# EAGLE board DroidOS (EAGLE 8.4.0)
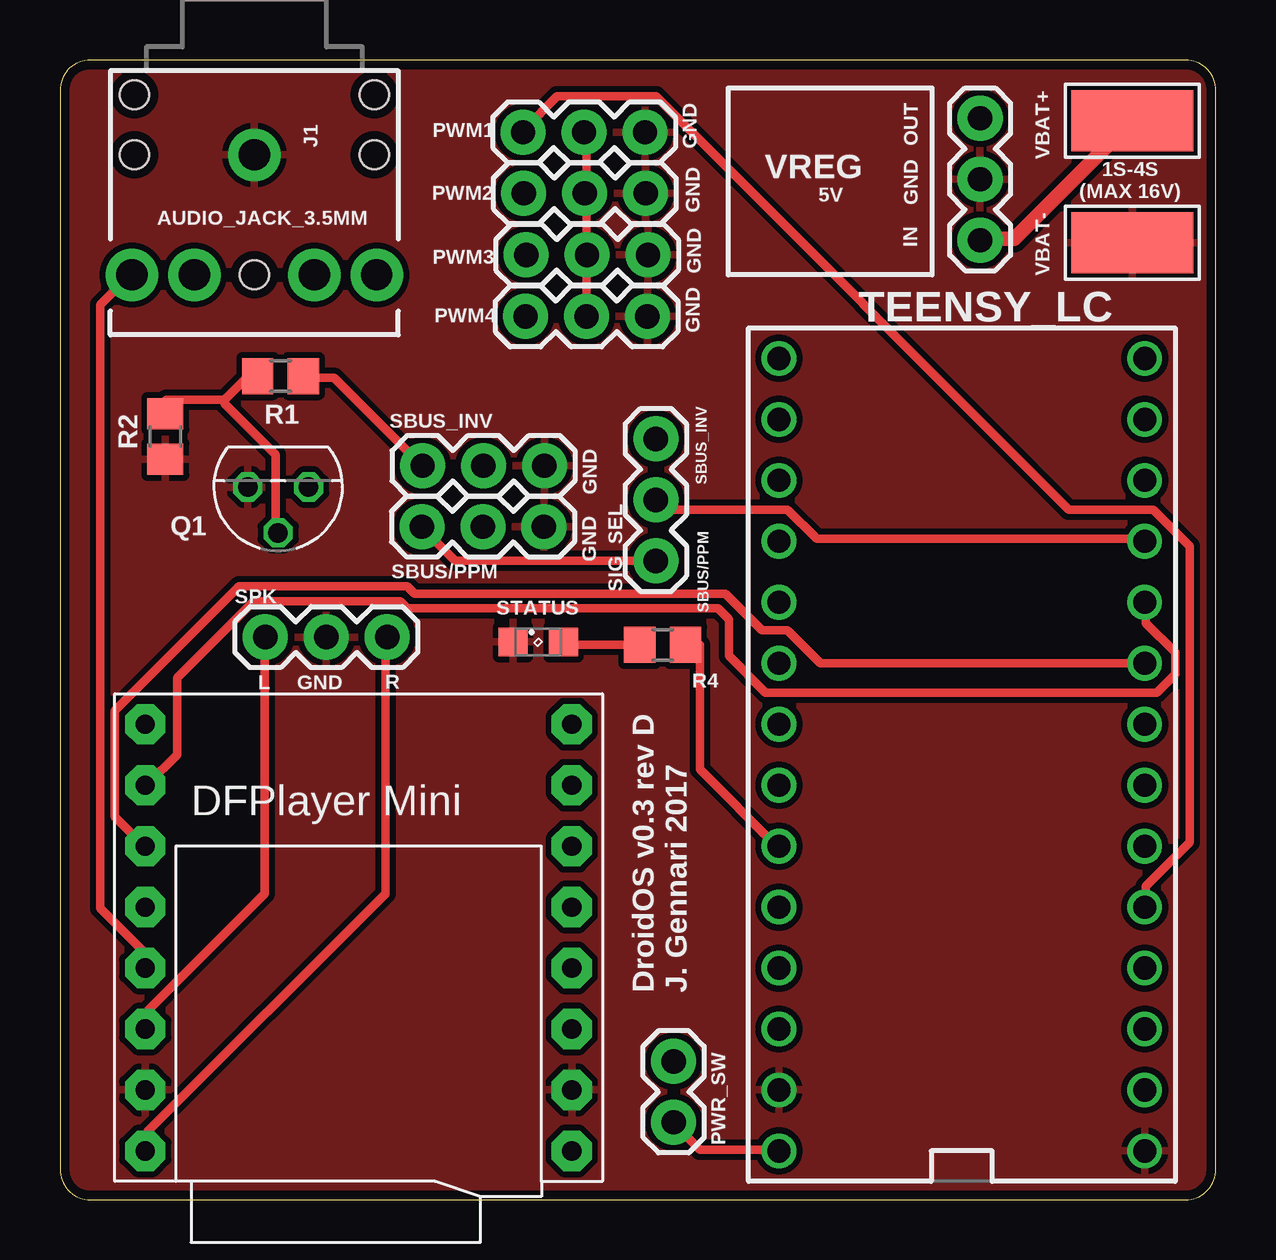
[diagram p0: board, top side]
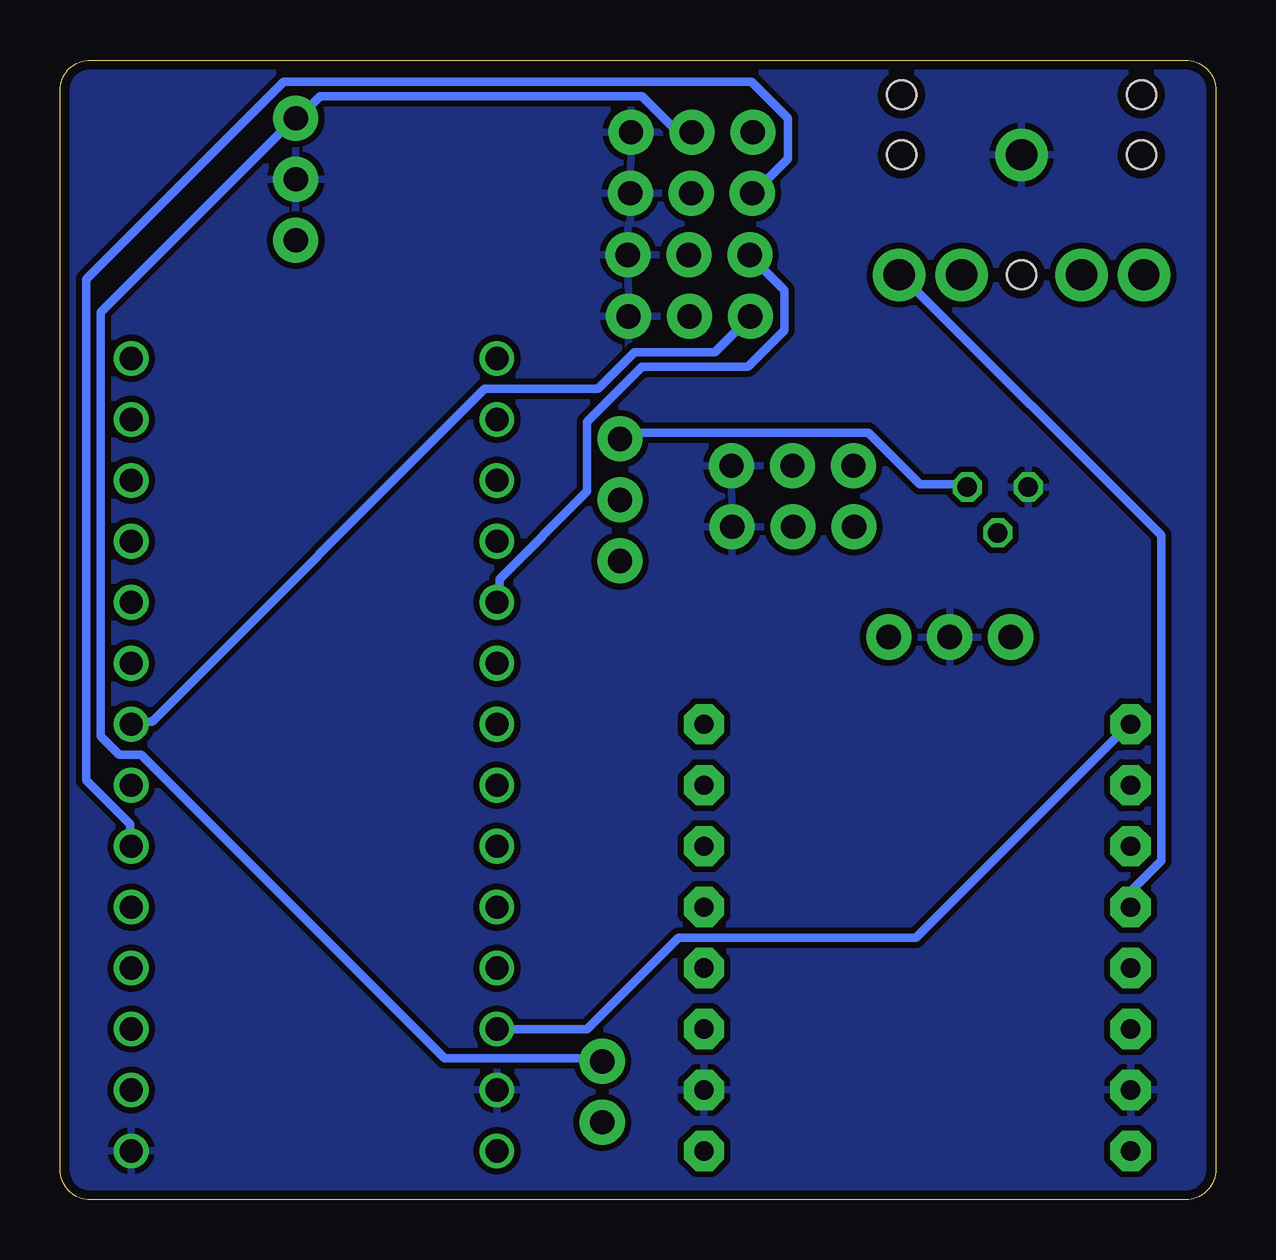
[diagram p1: board, bottom side, seen from below]

Size 48.18 x 47.49 mm. Coordinates in mm from the lower left corner, seen from the top.
Outline: 0,46.22 0,1.27 arc90 1.27,0 46.91,0 arc90 48.18,1.27 48.18,46.22 arc90 46.91,47.49 1.27,47.49 arc90 0,46.22
Copper layers (1*16): Top 0.0356mm / dielectric 1.5011mm / Bottom 0.0356mm
Design rules "LaenPCBOrder": minimum track width 6mil, minimum drill 13mil, track to track 6mil, track to pad 6mil, pad to pad 6mil, via to via 6mil, smd to smd 6mil, copper to edge 15mil, drill to drill 6mil, minimum pad ring 7mil, minimum via ring 7mil, stop-mask expansion 3mil, vias tented up to drill 0mil, thermal gap 10mil
Net classes: 0 default: width 0.356 mm, drill 0.381 mm, clearance 0.254 mm; 1 pwr: width 0.61 mm, drill 0.381 mm, clearance 0.254 mm

## Footprints (pad centres in the part's own frame; a part is rotated, then mirrored left to right if it is on the bottom)
AUDIO-JACK-KIT = drill 1.3 pad 2.184: RING 5,5.1; RSH 5,2.5; SLEEVE 0,0; TIP 5,-5.1; TSH 5,-2.5 | hole 1.2: 0,5; -2.5,5; -2.5,-5; 0,-5; 5,0
1X03 = drill 1.016 pad 1.88: 1 0,0; 2 2.54,0; 3 5.08,0
1X02 = drill 1.016 pad 1.88: 1 0,0; 2 2.54,0
TO92 = drill 0.813 octagon: 1 1.27,0; 2 0,1.905; 3 -1.27,0
R0805 = smd 1.3 x 1.5: 1 -0.95,0; 2 0.95,0
SML0805 = smd 1.2 x 1.2: A 1.05,0; C -1.05,0
TEENSY_3.0-3.2&LC_DIL = drill 0.965: 0 -7.62,13.97; 1 -7.62,11.43; 2 -7.62,8.89; 3 -7.62,6.35; 3.3V 7.62,11.43; 4 -7.62,3.81; 5 -7.62,1.27; 6 -7.62,-1.27; 7 -7.62,-3.81; 8 -7.62,-6.35; 9 -7.62,-8.89; 10 -7.62,-11.43; 11 -7.62,-13.97; 12 -7.62,-16.51; 13 7.62,-16.51; 14/A0 7.62,-13.97; 15/A1 7.62,-11.43; 16/A2 7.62,-8.89; 17/A3 7.62,-6.35; 18/A4 7.62,-3.81; 19/A5 7.62,-1.27; 20/A6 7.62,1.27; 21/A7 7.62,3.81; 22/A8 7.62,6.35; 23/A9 7.62,8.89; AGND 7.62,13.97; GND -7.62,16.51; VIN 7.62,16.51
DFPLAYER = drill 0.8 pad 1.676 octagon: ADKEY1 8.89,-1.27; ADKEY2 8.89,1.27; BUSY 8.89,8.89; DAC_L -8.89,-1.27; DAC_R -8.89,1.27; GND_1 -8.89,-6.35; GND_2 8.89,-6.35; IO1 8.89,-8.89; IO2 8.89,-3.81; RX -8.89,6.35; SPK1 -8.89,-3.81; SPK2 -8.89,-8.89; TX -8.89,3.81; USB+ 8.89,3.81; USB- 8.89,6.35; VCC -8.89,8.89
5-2,5 = smd 2.54 x 5.08: 1 0,0

## Placement (x,y rotation side)
J1  AUDIO_JACK_3.5MM  [AUDIO-JACK-KIT]  8.1,43.54 270 top
PWM1  [1X03]  19.3,44.48 0 top
PWM2  [1X03]  19.33,41.94 0 top
PWM3  [1X03]  19.43,39.37 0 top
PWM4  [1X03]  19.41,36.8 0 top
PWR_SW  [1X02]  25.58,5.77 270 top
Q1  BC337  [TO92]  9.09,29.69 180 top
R1  [R0805]  9.19,34.32 0 top
R2  [R0805]  4.39,31.8 90 top
R4  [R0805]  25.12,23.11 0 top
SBUS/PPM  [1X03]  15.09,28.04 0 top
SBUS_INV  [1X03]  15.11,30.58 0 top
SIG_SEL  [1X03]  24.84,26.62 90 top
SPK  [1X03]  8.56,23.44 0 top
STATUS  [SML0805]  19.94,23.24 0 top
U$1  TEENSY_LC  [TEENSY_3.0-3.2&LC_DIL]  37.59,18.54 180 top
U$2  DFPLAYER  [DFPLAYER]  12.45,10.92 0 top
VBAT+  WIREPADSMD5-2,5  [5-2,5]  44.7,44.96 90 top
VBAT-  WIREPADSMD5-2,5  [5-2,5]  44.7,39.88 90 top
VREG  5V  [1X03]  38.35,39.98 90 top

## Library data of the parts
J1 = SparkFun-Connectors; PROD_ID: CONN-08774; SF_ID: PRT-08032
PWM1-PWM4 PWR_SW SBUS/PPM SBUS_INV SIG_SEL SPK VREG = SparkFun-Connectors
Q1 = transistor-npn
R1 R2 R4 = resistor
STATUS = led
U$1 = Teensy_3_and_LC_Series_Boards_v1.4
U$2 = DFPlayer_v1
VBAT+ VBAT- = wirepad

## Nets
3V+: U$1.3.3V U$2.VCC
5V: PWM1.2 PWM2.2 PWM3.2 PWM4.2 PWR_SW.1 VREG.3
AUD_RX: U$1.8 U$2.RX
AUD_TX: U$1.7 U$2.TX
CTRL_SIG: SIG_SEL.2 U$1.9
DAC_L: J1.TIP U$2.DAC_L
DAC_R: J1.RING U$2.DAC_R
GND: J1.SLEEVE PWM1.3 PWM2.3 PWM3.3 PWM4.3 Q1.1 R2.1 SBUS/PPM.3 SBUS_INV.3 SPK.2 STATUS.C U$1.AGND U$1.GND U$2.GND_1 U$2.GND_2 VBAT-.1 VREG.2
N$1: PWR_SW.2 U$1.VIN
N$2: R4.1 STATUS.A
N$17: Q1.2 R1.1 R2.2
PWM1_SIG: PWM1.1 U$1.3
PWM2_SIG: PWM2.1 U$1.4
PWM3_SIG: PWM3.1 U$1.17/A3
PWM4_SIG: PWM4.1 U$1.6
SBUS_INV_IN: R1.2 SBUS_INV.1
SBUS_INV_OUT: Q1.3 SIG_SEL.3
SBUS_OUT: SBUS/PPM.1 SIG_SEL.1
SPK_L: SPK.1 U$2.SPK1
SPK_R: SPK.3 U$2.SPK2
STATUS_LED: R4.2 U$1.21/A7
VBAT [pwr]: VBAT+.1 VREG.1

## Tracks (layer width: path | path; a pad name or v marks a point on that pad's centre or on a via)
3V+
  Bottom 0.356: U$1.3.3V 26.21,7.11 22.4,10.92 12.5,10.92 3.66,19.76 U$2.VCC
5V
  Top 0.356: PWM1.2 21.95,44.45 21.95,42.01 PWM2.2 21.95,41.86 21.95,39.42 PWM3.2 21.95,39.27 PWM4.2
  Bottom 0.356: PWR_SW.1 25.6,5.89 32.16,5.89 44.81,18.54 45.72,18.54 46.48,19.3 46.48,36.98 38.41,45.06 VREG.3 38.25,45.06 37.34,45.97 23.93,45.97 22.55,44.6 21.95,44.6 PWM1.2
AUD_RX
  Top 0.356: U$1.8 45.26,24.79 45.26,24.03 46.48,22.81 46.48,21.89 45.72,21.13 29.41,21.13 27.89,22.66 27.89,24.18 27.43,24.64 14.48,24.64 14.17,24.94 8.08,24.94 4.88,21.74 4.88,18.54 3.66,17.32 U$2.RX
AUD_TX
  Top 0.356: U$1.7 31.7,22.35 30.33,23.72 29.26,23.72 27.74,25.25 14.78,25.25 14.48,25.55 7.47,25.55 2.29,20.37 2.29,15.95 3.5,14.73 U$2.TX
CTRL_SIG
  Top 0.356: U$1.9 45.11,27.53 31.55,27.53 30.33,28.75 25.15,28.75 24.84,29.06 SIG_SEL.2
DAC_L
  Top 0.356: U$2.DAC_L 3.5,9.7 3.5,10.31 1.68,12.14 1.68,37.29 2.9,38.51 J1.TIP
DAC_R
  Bottom 0.356: U$2.DAC_R 3.5,12.29 3.5,12.9 2.29,14.12 2.29,27.69 13.11,38.51 J1.RING
GND
  pour Top: -1.02,48.26 -1.02,-1.02 49.28,-1.02 49.28,48.26
  pour Bottom: -1.02,48.26 -1.02,-1.02 49.28,-1.02 49.28,48.26
N$1
  Top 0.356: U$1.VIN 29.87,2.08 26.67,2.08 25.6,3.15 PWR_SW.2
N$2
  Top 0.356: R4.1 21.49,23.11 STATUS.A
N$17
  Top 0.356: 6.86,33.33 4.42,33.33 R2.2 | 6.86,33.33 7.77,34.24 R1.1 | Q1.2 8.99,27.84 8.99,31.04 6.86,33.17 6.86,33.33
PWM1_SIG
  Top 0.356: U$1.3 45.26,12.29 45.26,13.06 47.09,14.88 47.09,27.23 45.57,28.75 42.06,28.75 24.84,45.97 20.73,45.97 19.36,44.6 PWM1.1
PWM2_SIG
  Bottom 0.356: U$1.4 45.26,14.73 45.26,15.65 47.09,17.48 47.09,38.35 38.86,46.58 19.36,46.58 17.83,45.06 17.83,43.38 19.2,42.01 PWM2.1
PWM3_SIG
  Bottom 0.356: U$1.17/A3 29.87,24.94 29.87,25.86 26.21,29.52 26.21,32.41 23.93,34.7 19.51,34.7 17.98,36.22 17.98,37.9 19.36,39.27 PWM3.1
PWM4_SIG
  Bottom 0.356: U$1.6 45.11,19.91 44.35,19.91 30.48,33.78 25.76,33.78 24.23,35.31 20.88,35.31 19.51,36.68 PWM4.1
SBUS_INV_IN
  Top 0.356: R1.2 10.67,34.24 11.43,34.24 15.09,30.58 SBUS_INV.1
SBUS_INV_OUT
  Bottom 0.356: Q1.3 10.36,29.82 12.34,29.82 14.48,31.95 24.69,31.95 24.84,31.8 SIG_SEL.3
SBUS_OUT
  Top 0.356: SIG_SEL.1 16.46,26.62 15.09,27.99 SBUS/PPM.1
SPK_L
  Top 0.356: U$2.SPK1 3.66,7.11 3.66,7.87 8.53,12.75 8.53,23.42 SPK.1
SPK_R
  Top 0.356: U$2.SPK2 3.66,2.08 3.66,2.84 13.56,12.75 13.56,23.42 SPK.3
STATUS_LED
  Top 0.356: R4.2 26.67,23.11 26.67,17.93 29.87,14.73 U$1.21/A7
VBAT
  Top 0.61: VBAT+.1 39.78,40.03 38.41,40.03 VREG.1

## Text on the board
tNames: OUT | GND | GND | 1S-4S / (MAX 16V) | GND | IN | GND | GND | SBUS_INV | GND | GND | SBUS/PPM | L | GND | R | DroidOS v0.3 rev D / J. Gennari 2017